# EAGLE board CT_schematic (EAGLE 7.6.0)

Size 100 x 80 mm. Coordinates in mm from the lower left corner, seen from the top.
Outline: 0,0 100,0 100,80 0,80 0,0
Copper layers (1*16): Top 0.035mm / dielectric 1.5mm / Bottom 0.035mm
Design rules "default": minimum track width 10mil, minimum drill 24mil, track to track 8mil, track to pad 8mil, pad to pad 8mil, via to via 8mil, smd to smd 8mil, copper to edge 40mil, drill to drill 8mil, minimum pad ring 10mil, minimum via ring 8mil, stop-mask expansion 4mil, vias tented up to drill 0mil, thermal gap 10mil

## Footprints (pad centres in the part's own frame; a part is rotated, then mirrored left to right if it is on the bottom)
C0402 = smd 0.5 x 0.5: 1 -0.508,0; 2 0.508,0
C0805 = smd 1.2 x 1.3: 1 -1.016,0; 2 1.016,0
C0603 = smd 0.8 x 0.8: 1 -0.762,0; 2 0.762,0
EXV-9B = smd 2.718 x 1.778: 1 -2.108,0; 2 2.108,0
C1206 = smd 1.3 x 1.6: 1 -1.524,0; 2 1.524,0
C1210 = smd 1.2 x 2.5: 1 -1.524,0; 2 1.524,0
2220 = smd 1.85 x 5.5: 1 -2.55,0; 2 2.55,0
R0603 = smd 0.8 x 0.8: 1 -0.762,0; 2 0.762,0
EXV-9H = smd 3.505 x 1.676: 1 -2.857,0; 2 2.857,0
DR1040 = smd 1.6 x 3.2: 1 -4.458,0; 2 4.458,0
WE-HCI_7030/7040/7050 = smd 2.5 x 3: 1 -2.45,0; 2 2.45,0
PJ-037B_PACKAGE = drill 3.7 square: 1 12,0 | drill 3.2 square: 2 6,0
LFBGA324 = smd 0.508 x 0.508: A1 -6.8,6.8; A2 -6,6.8; A3 -5.2,6.8; A4 -4.4,6.8; A5 -3.6,6.8; A6 -2.8,6.8; A7 -2,6.8; A8 -1.2,6.8; A9 -0.4,6.8; A10 0.4,6.8; A11 1.2,6.8; A12 2,6.8; A13 2.8,6.8; A14 3.6,6.8; A15 4.4,6.8; A16 5.2,6.8; A17 6,6.8; A18 6.8,6.8; B1 -6.8,6; B2 -6,6; B3 -5.2,6; B4 -4.4,6; B5 -3.6,6; B6 -2.8,6; B7 -2,6; B8 -1.2,6; B9 -0.4,6; B10 0.4,6; B11 1.2,6; B12 2,6; B13 2.8,6; B14 3.6,6; B15 4.4,6; B16 5.2,6; B17 6,6; B18 6.8,6; C1 -6.8,5.2; C2 -6,5.2; C3 -5.2,5.2; C4 -4.4,5.2; C5 -3.6,5.2; C6 -2.8,5.2; C7 -2,5.2; C8 -1.2,5.2; C9 -0.4,5.2; C10 0.4,5.2; C11 1.2,5.2; C12 2,5.2; C13 2.8,5.2; C14 3.6,5.2; C15 4.4,5.2; C16 5.2,5.2; C17 6,5.2; C18 6.8,5.2; D1 -6.8,4.4; D2 -6,4.4; D3 -5.2,4.4; D4 -4.4,4.4; D5 -3.6,4.4; D6 -2.8,4.4; D7 -2,4.4; D8 -1.2,4.4; D9 -0.4,4.4; D10 0.4,4.4; D11 1.2,4.4; D12 2,4.4; D13 2.8,4.4; D14 3.6,4.4; D15 4.4,4.4; D16 5.2,4.4; D17 6,4.4; D18 6.8,4.4; E1 -6.8,3.6; E2 -6,3.6; E3 -5.2,3.6; E4 -4.4,3.6; E5 -3.6,3.6; E6 -2.8,3.6; E7 -2,3.6; E8 -1.2,3.6; E9 -0.4,3.6; E10 0.4,3.6; E11 1.2,3.6; E12 2,3.6; E13 2.8,3.6; E14 3.6,3.6; E15 4.4,3.6; E16 5.2,3.6; E17 6,3.6; E18 6.8,3.6; F1 -6.8,2.8; F2 -6,2.8; F3 -5.2,2.8; F4 -4.4,2.8; F5 -3.6,2.8; F6 -2.8,2.8; F7 -2,2.8; F8 -1.2,2.8; F9 -0.4,2.8; F10 0.4,2.8; F11 1.2,2.8; F12 2,2.8; F13 2.8,2.8; F14 3.6,2.8; F15 4.4,2.8; F16 5.2,2.8; F17 6,2.8; F18 6.8,2.8; G1 -6.8,2; G2 -6,2; G3 -5.2,2; G4 -4.4,2; G5 -3.6,2; G6 -2.8,2; G7 -2,2; G8 -1.2,2; G9 -0.4,2; G10 0.4,2; G11 1.2,2; G12 2,2; G13 2.8,2; G14 3.6,2; G15 4.4,2; G16 5.2,2; G17 6,2; G18 6.8,2; H1 -6.8,1.2; H2 -6,1.2; H3 -5.2,1.2; H4 -4.4,1.2; H5 -3.6,1.2; H6 -2.8,1.2; H7 -2,1.2; H8 -1.2,1.2; H9 -0.4,1.2; H10 0.4,1.2; H11 1.2,1.2; H12 2,1.2; H13 2.8,1.2; H14 3.6,1.2; H15 4.4,1.2; H16 5.2,1.2; H17 6,1.2; H18 6.8,1.2; J1 -6.8,0.4; J2 -6,0.4; J3 -5.2,0.4; J4 -4.4,0.4; J5 -3.6,0.4; J6 -2.8,0.4; J7 -2,0.4; J8 -1.2,0.4; J9 -0.4,0.4; J10 0.4,0.4; J11 1.2,0.4; J12 2,0.4; J13 2.8,0.4; J14 3.6,0.4; J15 4.4,0.4; J16 5.2,0.4; J17 6,0.4; J18 6.8,0.4; K1 -6.8,-0.4; K2 -6,-0.4; K3 -5.2,-0.4; K4 -4.4,-0.4; K5 -3.6,-0.4; K6 -2.8,-0.4; K7 -2,-0.4; K8 -1.2,-0.4; K9 -0.4,-0.4; K10 0.4,-0.4; K11 1.2,-0.4; K12 2,-0.4; K13 2.8,-0.4; K14 3.6,-0.4; K15 4.4,-0.4; K16 5.2,-0.4; K17 6,-0.4; K18 6.8,-0.4; L1 -6.8,-1.2; L2 -6,-1.2; L3 -5.2,-1.2; L4 -4.4,-1.2; L5 -3.6,-1.2; L6 -2.8,-1.2; L7 -2,-1.2; L8 -1.2,-1.2; L9 -0.4,-1.2; L10 0.4,-1.2; L11 1.2,-1.2; L12 2,-1.2; L13 2.8,-1.2; L14 3.6,-1.2; L15 4.4,-1.2; L16 5.2,-1.2; L17 6,-1.2; L18 6.8,-1.2; M1 -6.8,-2; M2 -6,-2; M3 -5.2,-2; M4 -4.4,-2; M5 -3.6,-2; M6 -2.8,-2; M7 -2,-2; M8 -1.2,-2; M9 -0.4,-2; M10 0.4,-2; M11 1.2,-2; M12 2,-2; M13 2.8,-2; M14 3.6,-2; M15 4.4,-2; M16 5.2,-2; M17 6,-2; M18 6.8,-2; N1 -6.8,-2.8; N2 -6,-2.8; N3 -5.2,-2.8; N4 -4.4,-2.8; N5 -3.6,-2.8; N6 -2.8,-2.8; N7 -2,-2.8; N8 -1.2,-2.8; N9 -0.4,-2.8; N10 0.4,-2.8; N11 1.2,-2.8; N12 2,-2.8; N13 2.8,-2.8; N14 3.6,-2.8; N15 4.4,-2.8; N16 5.2,-2.8; N17 6,-2.8; N18 6.8,-2.8; P1 -6.8,-3.6; P2 -6,-3.6; P3 -5.2,-3.6; P4 -4.4,-3.6; P5 -3.6,-3.6; P6 -2.8,-3.6; P7 -2,-3.6; P8 -1.2,-3.6; P9 -0.4,-3.6; P10 0.4,-3.6; P11 1.2,-3.6; P12 2,-3.6; P13 2.8,-3.6; P14 3.6,-3.6; P15 4.4,-3.6; P16 5.2,-3.6; P17 6,-3.6; P18 6.8,-3.6; R1 -6.8,-4.4; R2 -6,-4.4; R3 -5.2,-4.4; R4 -4.4,-4.4; R5 -3.6,-4.4; R6 -2.8,-4.4; R7 -2,-4.4; R8 -1.2,-4.4; R9 -0.4,-4.4; R10 0.4,-4.4; R11 1.2,-4.4; R12 2,-4.4; R13 2.8,-4.4; R14 3.6,-4.4; R15 4.4,-4.4; R16 5.2,-4.4; R17 6,-4.4; R18 6.8,-4.4; T1 -6.8,-5.2; T2 -6,-5.2; T3 -5.2,-5.2; T4 -4.4,-5.2; T5 -3.6,-5.2; T6 -2.8,-5.2; T7 -2,-5.2; T8 -1.2,-5.2; T9 -0.4,-5.2; T10 0.4,-5.2; T11 1.2,-5.2; T12 2,-5.2; T13 2.8,-5.2; T14 3.6,-5.2; T15 4.4,-5.2; T16 5.2,-5.2; T17 6,-5.2; T18 6.8,-5.2; U1 -6.8,-6; U2 -6,-6; U3 -5.2,-6; U4 -4.4,-6; U5 -3.6,-6; U6 -2.8,-6; U7 -2,-6; U8 -1.2,-6; U9 -0.4,-6; U10 0.4,-6; U11 1.2,-6; U12 2,-6; U13 2.8,-6; U14 3.6,-6; U15 4.4,-6; U16 5.2,-6; U17 6,-6; U18 6.8,-6; V1 -6.8,-6.8; V2 -6,-6.8; V3 -5.2,-6.8; V4 -4.4,-6.8; V5 -3.6,-6.8; V6 -2.8,-6.8; V7 -2,-6.8; V8 -1.2,-6.8; V9 -0.4,-6.8; V10 0.4,-6.8; V11 1.2,-6.8; V12 2,-6.8; V13 2.8,-6.8; V14 3.6,-6.8; V15 4.4,-6.8; V16 5.2,-6.8; V17 6,-6.8; V18 6.8,-6.8
10100565 = smd 0.8 x 2.35: 1 0,0; 2 1.25,0; 3 2.55,0; 4 4.25,0; 5 5.43,0; 6 6.68,0; 7 7.93,0; 8 9.18,0; 9 11.67,0; 10 14.18,0; 11 15.43,0; 12 16.68,0; 13 17.93,0; 14 19.18,0; 15 21.68,0 | smd 1.5 x 3.1: 16 23.495,-1.375; 20 25.685,-22.875 | smd 1.55 x 3.1: 17 -1.815,-1.375; 21 -1.815,-22.875 | drill 1.1 pad 1.1: 18 21.68,-2.375; 19 0.68,-2.375
SAMTEC_FTSH-105-01-L-DV-K = smd 0.762 x 2.794: 1 -2.54,-2.032; 2 -2.54,2.032; 3 -1.27,-2.032; 4 -1.27,2.032; 5 0,-2.032; 6 0,2.032; 7 1.27,-2.032; 8 1.27,2.032; 9 2.54,-2.032; 10 2.54,2.032
QFN-32 = smd 0.6 x 0.3: 1 -2.3,1.75; 2 -2.3,1.25; 3 -2.3,0.75; 4 -2.3,0.25; 5 -2.3,-0.25; 6 -2.3,-0.75; 7 -2.3,-1.25; 8 -2.3,-1.75; 17 2.3,-1.75; 18 2.3,-1.25; 19 2.3,-0.75; 20 2.3,-0.25; 21 2.3,0.25; 22 2.3,0.75; 23 2.3,1.25; 24 2.3,1.75 | smd 0.3 x 0.6: 9 -1.75,-2.3; 10 -1.25,-2.3; 11 -0.75,-2.3; 12 -0.25,-2.3; 13 0.25,-2.3; 14 0.75,-2.3; 15 1.25,-2.3; 16 1.75,-2.3; 25 1.75,2.3; 26 1.25,2.3; 27 0.75,2.3; 28 0.25,2.3; 29 -0.25,2.3; 30 -0.75,2.3; 31 -1.25,2.3; 32 -1.75,2.3 | smd 3.2 x 3.2: EXP 0,0
7498011122R = smd 0.71 x 2.29: 1 -3.545,-3.18; 2 -2.525,-3.18; 3 -1.505,-3.18; 4 -0.485,-3.18; 5 0.535,-3.18; 6 1.555,-3.18; 8 3.595,-3.18; 9 5.635,-3.18; 10 6.655,-3.18; 11 -6.605,-3.18; 12 -5.585,-3.18 | smd 1.4 x 2.54: 13 -8.51,10.2; 14 8.51,10.2 | hole 1.4: -3.5,0; 3.5,0
AT24C02D = smd 1.6 x 0.6: 1 -2.475,1.905 | smd 1.55 x 0.6: 2 -2.475,0.635; 3 -2.475,-0.635; 4 -2.475,-1.905; 5 2.475,-1.905; 6 2.475,-0.635; 7 2.475,0.635; 8 2.475,1.905
S29VS256RABBHW000 = smd 0.3 x 0.3: A1 -6,3; A14 0.5,3; C3 -5,2; C4 -4.5,2; C5 -4,2; C6 -3.5,2; C7 -3,2; C8 -2.5,2; C9 -2,2; C10 -1.5,2; C11 -1,2; C12 -0.5,2; D3 -5,1.5; D4 -4.5,1.5; D5 -4,1.5; D6 -3.5,1.5; D7 -3,1.5; D8 -2.5,1.5; D9 -2,1.5; D10 -1.5,1.5; D11 -1,1.5; D12 -0.5,1.5; E3 -5,1; E4 -4.5,1; E5 -4,1; E6 -3.5,1; E7 -3,1; E8 -2.5,1; E9 -2,1; E10 -1.5,1; E11 -1,1; E12 -0.5,1; F3 -5,0.5; F4 -4.5,0.5; F5 -4,0.5; F6 -3.5,0.5; F7 -3,0.5; F8 -2.5,0.5; F9 -2,0.5; F10 -1.5,0.5; F11 -1,0.5; F12 -0.5,0.5; H1 -6,-0.5; H14 0.5,-0.5
ABS07-32.768KHZ-7-T = smd 1.1 x 2.4: 1 -2.5,0; 2 0,0
ABLS-25.000MHZ-B2F-T = smd 5.6 x 2.8: 1 -3.81,0; 2 5.69,0
ASDMB-XX.XXXXMHZ-XX-XX-XXX = smd 0.65 x 0.85: 1 0.45,0.2; 2 2.05,0.2; 3 2.05,1.8; 4 0.45,1.8
LP2954 = smd 1.6 x 0.6: 1 -2.475,1.905 | smd 1.55 x 0.6: 2 -2.475,0.635; 3 -2.475,-0.635; 4 -2.475,-1.905; 5 2.475,-1.905; 6 2.475,-0.635; 7 2.475,0.635; 8 2.475,1.905
WSON-8 = smd 0.3 x 0.6: 1 -0.75,0; 2 0.05,0; 3 0.85,0; 4 1.65,0; 5 1.65,3.8; 6 0.85,3.8; 7 0.05,3.8; 8 -0.75,3.8 | smd 3 x 2.6: PAD 0.45,1.9
QFN-16_EP = smd 0.805 x 0.3: 1 -1.452,0.75; 2 -1.452,0.25; 3 -1.452,-0.25; 4 -1.452,-0.75; 9 1.452,-0.75; 10 1.452,-0.25; 11 1.452,0.25; 12 1.452,0.75 | smd 0.3 x 0.805: 5 -0.75,-1.452; 6 -0.25,-1.452; 7 0.25,-1.452; 8 0.75,-1.452; 13 0.75,1.452; 14 0.25,1.452; 15 -0.25,1.452; 16 -0.75,1.452 | smd 1.55 x 1.55: 17 0,0
QFN-38_UHF = smd 0.75 x 0.3: 1 -2.4,2.75; 2 -2.4,2.25; 3 -2.4,1.75; 4 -2.4,1.25; 6 -2.4,0.25; 7 -2.4,-0.25; 8 -2.4,-0.75; 9 -2.4,-1.25; 10 -2.4,-1.75; 11 -2.4,-2.25; 12 -2.4,-2.75; 20 2.4,-2.75; 21 2.4,-2.25; 22 2.4,-1.75; 23 2.4,-1.25; 24 2.4,-0.75; 25 2.4,-0.25; 26 2.4,0.25; 27 2.4,0.75; 28 2.4,1.25; 29 2.4,1.75; 30 2.4,2.25; 31 2.4,2.75 | smd 0.758 x 0.3: 5 -2.4,0.75 | smd 0.3 x 0.75: 13 -1.5,-3.4; 14 -1,-3.4; 15 -0.5,-3.4; 16 0,-3.4; 17 0.5,-3.4; 18 1,-3.4; 19 1.5,-3.4; 32 1.5,3.4; 33 1,3.4; 34 0.5,3.4; 35 0,3.4; 36 -0.5,3.4; 37 -1,3.4; 38 -1.5,3.4 | smd 3.2 x 5.2: 39 0,0
IRF8306MTRPBF = smd 0.9 x 1.85: 1 0,0; 2 0,-2.35; 6 6.4,0; 7 6.4,-2.35 | smd 0.75 x 0.75: 3 1.75,-1.175 | smd 1.45 x 0.87: 4 3.5,-0.565; 5 3.5,-1.785
SW_4-1437565-2 = smd 1.4 x 2.1: 1 -2.23,4.55; 2 -2.23,-4.55; 3 2.23,4.55; 4 2.23,-4.55
LGM67K-G1J2-24-Z = smd 0.8 x 1.4: A -2,0; C 0,0
NC7SZ125M5X = smd 1.3 x 0.7: 1 -1.3,0.95; 2 -1.3,0; 3 -1.3,-0.95; 4 1.3,-0.95; 5 1.3,0.95

## Placement (x,y rotation side)
C1  1e-07  [C0402]  -102.87,109.22 0 top  (outside the outline)
C2  1e-08  [C0402]  -106.68,109.22 0 top  (outside the outline)
C3  1e-08  [C0402]  -110.49,109.22 0 top  (outside the outline)
C4  1e-08  [C0402]  -114.3,109.22 0 top  (outside the outline)
C5  1e-08  [C0402]  -15.24,114.3 0 top  (outside the outline)
C6  1e-07  [C0402]  -19.05,114.3 0 top  (outside the outline)
C7  1e-07  [C0402]  -22.86,114.3 0 top  (outside the outline)
C8  1e-08  [C0402]  -26.67,114.3 0 top  (outside the outline)
C9  1e-08  [C0402]  -30.48,114.3 0 top  (outside the outline)
C10  1e-08  [C0402]  -34.29,114.3 0 top  (outside the outline)
C11  1e-05  [C0805]  -40.64,72.39 0 top  (outside the outline)
C12  1e-08  [C0402]  -38.1,114.3 0 top  (outside the outline)
C13  1e-05  [C0805]  -45.72,72.39 0 top  (outside the outline)
C14  1e-08  [C0402]  -41.91,114.3 0 top  (outside the outline)
C15  1e-08  [C0402]  -45.72,114.3 0 top  (outside the outline)
C16  1e-08  [C0402]  -49.53,114.3 0 top  (outside the outline)
C17  1e-05  [C0805]  -50.8,72.39 0 top  (outside the outline)
C18  1e-08  [C0402]  -53.34,114.3 0 top  (outside the outline)
C19  1e-08  [C0402]  -57.15,114.3 0 top  (outside the outline)
C20  1e-05  [C0805]  -55.88,72.39 0 top  (outside the outline)
C21  1e-08  [C0402]  -60.96,114.3 0 top  (outside the outline)
C22  1e-08  [C0402]  -64.77,114.3 0 top  (outside the outline)
C23  1e-05  [C0805]  -60.96,72.39 0 top  (outside the outline)
C24  1e-08  [C0402]  -68.58,114.3 0 top  (outside the outline)
C25  1e-08  [C0402]  -72.39,114.3 0 top  (outside the outline)
C26  1e-05  [C0805]  -66.04,72.39 0 top  (outside the outline)
C27  1e-08  [C0402]  -76.2,114.3 0 top  (outside the outline)
C28  1e-08  [C0402]  -80.01,114.3 0 top  (outside the outline)
C29  1e-05  [C0805]  -71.12,72.39 0 top  (outside the outline)
C30  1e-08  [C0402]  -83.82,114.3 0 top  (outside the outline)
C31  1e-08  [C0402]  -87.63,114.3 0 top  (outside the outline)
C32  1e-05  [C0805]  -76.2,72.39 0 top  (outside the outline)
C33  1e-08  [C0402]  -91.44,114.3 0 top  (outside the outline)
C34  1e-08  [C0402]  -95.25,114.3 0 top  (outside the outline)
C35  1e-08  [C0402]  -99.06,114.3 0 top  (outside the outline)
C36  1e-08  [C0402]  -102.87,114.3 0 top  (outside the outline)
C37  1e-08  [C0402]  -106.68,114.3 0 top  (outside the outline)
C38  1e-08  [C0402]  -110.49,114.3 0 top  (outside the outline)
C39  1e-06  [C0603]  -80.01,99.06 0 top  (outside the outline)
C40  1e-06  [C0603]  -83.82,99.06 0 top  (outside the outline)
C41  1e-06  [C0603]  -87.63,99.06 0 top  (outside the outline)
C42  1e-06  [C0603]  -91.44,99.06 0 top  (outside the outline)
C43  1.2e-11  [C0402]  -34.29,109.22 0 top  (outside the outline)
C44  1.2e-11  [C0402]  -38.1,109.22 0 top  (outside the outline)
C45  1e-05  [C0805]  -81.28,72.39 0 top  (outside the outline)
C46  1e-08  [C0402]  -114.3,114.3 0 top  (outside the outline)
C47  1e-08  [C0402]  -15.24,119.38 0 top  (outside the outline)
C48  1e-08  [C0402]  -19.05,119.38 0 top  (outside the outline)
C49  1e-08  [C0402]  -22.86,119.38 0 top  (outside the outline)
C50  1e-08  [C0402]  -26.67,119.38 0 top  (outside the outline)
C51  1e-08  [C0402]  -30.48,119.38 0 top  (outside the outline)
C52  1e-08  [C0402]  -34.29,119.38 0 top  (outside the outline)
C53  1e-08  [C0402]  -38.1,119.38 0 top  (outside the outline)
C54  1e-05  [C0805]  -86.36,72.39 0 top  (outside the outline)
C55  1e-08  [C0402]  -41.91,119.38 0 top  (outside the outline)
C56  1e-08  [C0402]  -45.72,119.38 0 top  (outside the outline)
C57  1e-08  [C0402]  -49.53,119.38 0 top  (outside the outline)
C58  1e-08  [C0402]  -53.34,119.38 0 top  (outside the outline)
C59  1e-08  [C0402]  -57.15,119.38 0 top  (outside the outline)
C60  1e-05  [C0805]  -91.44,72.39 0 top  (outside the outline)
C61  1e-08  [C0402]  -60.96,119.38 0 top  (outside the outline)
C62  1e-08  [C0402]  -64.77,119.38 0 top  (outside the outline)
C63  1e-08  [C0402]  -68.58,119.38 0 top  (outside the outline)
C64  1e-08  [C0402]  -72.39,119.38 0 top  (outside the outline)
C65  1e-07  [C0402]  -76.2,119.38 0 top  (outside the outline)
C66  1e-05  [C0805]  -96.52,72.39 0 top  (outside the outline)
C67  1e-05  [C0805]  -101.6,72.39 0 top  (outside the outline)
C68  1e-05  [C0805]  -106.68,72.39 0 top  (outside the outline)
C69  1e-05  [C0805]  -111.76,72.39 0 top  (outside the outline)
C70  1e-07  [C0402]  -80.01,119.38 0 top  (outside the outline)
C71  1e-07  [C0402]  -83.82,119.38 0 top  (outside the outline)
C72  1e-07  [C0402]  -87.63,119.38 0 top  (outside the outline)
C73  1e-07  [C0402]  -91.44,119.38 0 top  (outside the outline)
C74  1e-07  [C0402]  -95.25,119.38 0 top  (outside the outline)
C75  1e-07  [C0402]  -99.06,119.38 0 top  (outside the outline)
C76  1e-07  [C0402]  -102.87,119.38 0 top  (outside the outline)
C77  1e-07  [C0402]  -106.68,119.38 0 top  (outside the outline)
C78  1e-07  [C0402]  -110.49,119.38 0 top  (outside the outline)
C79  1e-07  [C0402]  -114.3,119.38 0 top  (outside the outline)
C80  1e-07  [C0402]  -15.24,124.46 0 top  (outside the outline)
C81  1e-07  [C0402]  -19.05,124.46 0 top  (outside the outline)
C82  1e-07  [C0402]  -22.86,124.46 0 top  (outside the outline)
C83  1e-07  [C0402]  -26.67,124.46 0 top  (outside the outline)
C84  1e-07  [C0402]  -30.48,124.46 0 top  (outside the outline)
C85  1e-07  [C0402]  -34.29,124.46 0 top  (outside the outline)
C86  1e-07  [C0402]  -38.1,124.46 0 top  (outside the outline)
C87  1e-07  [C0402]  -41.91,124.46 0 top  (outside the outline)
C88  1e-07  [C0402]  -45.72,124.46 0 top  (outside the outline)
C89  1e-07  [C0402]  -49.53,124.46 0 top  (outside the outline)
C90  1e-07  [C0402]  -53.34,124.46 0 top  (outside the outline)
C91  1e-07  [C0402]  -57.15,124.46 0 top  (outside the outline)
C92  1e-05  [C0805]  -15.24,78.74 0 top  (outside the outline)
C93  1e-07  [C0402]  -60.96,124.46 0 top  (outside the outline)
C94  2.2e-08  [C0402]  -41.91,109.22 0 top  (outside the outline)
C95  1e-06  [C0603]  -95.25,99.06 0 top  (outside the outline)
C96  1e-06  [C0603]  -99.06,99.06 0 top  (outside the outline)
C97  4.7e-10  [C0603]  -64.77,99.06 0 top  (outside the outline)
C98  1e-06  [C0603]  -102.87,99.06 0 top  (outside the outline)
C99  1e-11  [C0402]  -64.77,124.46 0 top  (outside the outline)
C100  1e-11  [C0402]  -45.72,109.22 0 top  (outside the outline)
C101  1e-08  [C0402]  -49.53,109.22 0 top  (outside the outline)
C102  1e-07  [C0402]  -53.34,109.22 0 top  (outside the outline)
C103  2.2e-06  [C0603]  -68.58,99.06 0 top  (outside the outline)
C104  1e-07  [C0402]  -57.15,109.22 0 top  (outside the outline)
C105  2.2e-06  [C0603]  -72.39,99.06 0 top  (outside the outline)
C106  1e-08  [C0402]  -60.96,109.22 0 top  (outside the outline)
C107  1e-06  [EXV-9B]  -100.33,64.77 0 top  (outside the outline)
C108  2.2e-06  [EXV-9B]  -109.22,64.77 0 top  (outside the outline)
C109  1e-08  [C0402]  -64.77,109.22 0 top  (outside the outline)
C110  1e-05  [C1206]  -86.36,64.77 0 top  (outside the outline)
C111  1e-05  [C0805]  -20.32,78.74 0 top  (outside the outline)
C112  1e-06  [C0603]  -106.68,99.06 0 top  (outside the outline)
C113  1e-05  [C1210]  -80.01,66.04 0 top  (outside the outline)
C114  1e-08  [C0402]  -68.58,109.22 0 top  (outside the outline)
C115  1e-05  [C1206]  -92.71,64.77 0 top  (outside the outline)
C116  1e-05  [C0805]  -25.4,78.74 0 top  (outside the outline)
C117  1e-05  [C0805]  -30.48,78.74 0 top  (outside the outline)
C118  1e-06  [C0603]  -110.49,99.06 0 top  (outside the outline)
C119  1e-07  [C0402]  -72.39,109.22 0 top  (outside the outline)
C120  6.8e-05  [2220]  -93.98,48.26 0 top  (outside the outline)
C121  1e-05  [C0805]  -35.56,78.74 0 top  (outside the outline)
C122  1e-06  [C0603]  -114.3,99.06 0 top  (outside the outline)
C123  1e-07  [C0402]  -76.2,109.22 0 top  (outside the outline)
C124  6.8e-05  [2220]  -101.6,48.26 0 top  (outside the outline)
C125  1e-05  [C0805]  -40.64,78.74 0 top  (outside the outline)
C126  1e-06  [C0603]  -15.24,104.14 0 top  (outside the outline)
C127  1e-07  [C0402]  -80.01,109.22 0 top  (outside the outline)
C128  6.8e-05  [2220]  -109.22,48.26 0 top  (outside the outline)
C129  1e-07  [C0402]  -83.82,109.22 0 top  (outside the outline)
C130  2.2e-06  [C0603]  -76.2,99.06 0 top  (outside the outline)
C131  2.45e-08  [R0603]  -50.8,88.9 0 top  (outside the outline)
C132  2.8258362168397e-09  [R0603]  -50.8,78.74 0 top  (outside the outline)
C133  7.105e-09  [R0603]  -60.96,78.74 0 top  (outside the outline)
C134  0.0001  [EXV-9H]  -105.41,57.15 0 top  (outside the outline)
C135  0.0001  [EXV-9H]  -17.78,66.04 0 top  (outside the outline)
C136  1e-08  [C0402]  -87.63,109.22 0 top  (outside the outline)
C137  1e-08  [C0402]  -91.44,109.22 0 top  (outside the outline)
C138  1e-08  [C0402]  -95.25,109.22 0 top  (outside the outline)
C139  1e-08  [C0402]  -99.06,109.22 0 top  (outside the outline)
I1  97.0  [R0603]  -19.05,104.14 0 top  (outside the outline)
I5  2.5e-06  [DR1040]  -62.23,35.56 0 top  (outside the outline)
I6  3.3e-06  [WE-HCI_7030/7040/7050]  -33.02,35.56 0 top  (outside the outline)
I7  3.8e-06  [DR1040]  -73.66,35.56 0 top  (outside the outline)
J1  PJ-037B  [PJ-037B_PACKAGE]  -27.94,36.83 0 top  (outside the outline)
R2  1000.0  [R0603]  -22.86,104.14 0 top  (outside the outline)
R4  4700.0  [R0603]  -26.67,104.14 0 top  (outside the outline)
R5  4700.0  [R0603]  -30.48,104.14 0 top  (outside the outline)
R6  4700.0  [R0603]  -34.29,104.14 0 top  (outside the outline)
R7  4700.0  [R0603]  -38.1,104.14 0 top  (outside the outline)
R8  2200.0  [R0603]  -41.91,104.14 0 top  (outside the outline)
R9  2200.0  [R0603]  -45.72,104.14 0 top  (outside the outline)
R10  2200.0  [R0603]  -49.53,104.14 0 top  (outside the outline)
R11  2200.0  [R0603]  -53.34,104.14 0 top  (outside the outline)
R12  22.0  [R0603]  -57.15,104.14 0 top  (outside the outline)
R13  10000.0  [R0603]  -55.88,88.9 0 top  (outside the outline)
R14  49.9  [R0603]  -60.96,104.14 0 top  (outside the outline)
R15  100000.0  [R0603]  -66.04,78.74 0 top  (outside the outline)
R16  100000.0  [R0603]  -71.12,78.74 0 top  (outside the outline)
R17  100000.0  [R0603]  -76.2,78.74 0 top  (outside the outline)
R18  100000.0  [R0603]  -81.28,78.74 0 top  (outside the outline)
R19  100000.0  [R0603]  -86.36,78.74 0 top  (outside the outline)
R20  100000.0  [R0603]  -91.44,78.74 0 top  (outside the outline)
R21  100000.0  [R0603]  -96.52,78.74 0 top  (outside the outline)
R22  100000.0  [R0603]  -101.6,78.74 0 top  (outside the outline)
R23  100000.0  [R0603]  -106.68,78.74 0 top  (outside the outline)
R24  100000.0  [R0603]  -111.76,78.74 0 top  (outside the outline)
R25  100000.0  [R0603]  -15.24,83.82 0 top  (outside the outline)
R26  100000.0  [R0603]  -20.32,83.82 0 top  (outside the outline)
R27  100000.0  [R0603]  -25.4,83.82 0 top  (outside the outline)
R28  100000.0  [R0603]  -30.48,83.82 0 top  (outside the outline)
R29  100000.0  [R0603]  -35.56,83.82 0 top  (outside the outline)
R30  100000.0  [R0603]  -40.64,83.82 0 top  (outside the outline)
R31  100000.0  [R0603]  -45.72,83.82 0 top  (outside the outline)
R32  100000.0  [R0603]  -50.8,83.82 0 top  (outside the outline)
R33  100000.0  [R0603]  -55.88,83.82 0 top  (outside the outline)
R34  100000.0  [R0603]  -60.96,83.82 0 top  (outside the outline)
R35  100000.0  [R0603]  -66.04,83.82 0 top  (outside the outline)
R36  100000.0  [R0603]  -71.12,83.82 0 top  (outside the outline)
R37  100000.0  [R0603]  -76.2,83.82 0 top  (outside the outline)
R38  100000.0  [R0603]  -81.28,83.82 0 top  (outside the outline)
R39  100000.0  [R0603]  -86.36,83.82 0 top  (outside the outline)
R40  100000.0  [R0603]  -91.44,83.82 0 top  (outside the outline)
R41  100000.0  [R0603]  -96.52,83.82 0 top  (outside the outline)
R42  10000.0  [R0603]  -60.96,88.9 0 top  (outside the outline)
R43  10000.0  [R0603]  -66.04,88.9 0 top  (outside the outline)
R44  10000.0  [R0603]  -71.12,88.9 0 top  (outside the outline)
R45  10000.0  [R0603]  -76.2,88.9 0 top  (outside the outline)
R46  5.0  [R0603]  -64.77,104.14 0 top  (outside the outline)
R47  0.1  [R0603]  -68.58,104.14 0 top  (outside the outline)
R48  0.1  [R0603]  -72.39,104.14 0 top  (outside the outline)
R49  200.0  [R0603]  -76.2,104.14 0 top  (outside the outline)
R50  200.0  [R0603]  -80.01,104.14 0 top  (outside the outline)
R51  12100.0  [R0603]  -81.28,88.9 0 top  (outside the outline)
R52  49.9  [R0603]  -83.82,104.14 0 top  (outside the outline)
R53  49.9  [R0603]  -87.63,104.14 0 top  (outside the outline)
R54  49.9  [R0603]  -91.44,104.14 0 top  (outside the outline)
R55  10000.0  [R0603]  -86.36,88.9 0 top  (outside the outline)
R56  49.9  [R0603]  -95.25,104.14 0 top  (outside the outline)
R57  10000.0  [R0603]  -91.44,88.9 0 top  (outside the outline)
R58  10000.0  [R0603]  -96.52,88.9 0 top  (outside the outline)
R59  10000.0  [R0603]  -101.6,88.9 0 top  (outside the outline)
R60  10000.0  [R0603]  -106.68,88.9 0 top  (outside the outline)
R61  10000.0  [R0603]  -111.76,88.9 0 top  (outside the outline)
R62  10000.0  [R0603]  -15.24,93.98 0 top  (outside the outline)
R63  10000.0  [R0603]  -20.32,93.98 0 top  (outside the outline)
R64  10000.0  [R0603]  -25.4,93.98 0 top  (outside the outline)
R65  10000.0  [R0603]  -30.48,93.98 0 top  (outside the outline)
R66  10000.0  [R0603]  -35.56,93.98 0 top  (outside the outline)
R67  10000.0  [R0603]  -40.64,93.98 0 top  (outside the outline)
R68  10000.0  [R0603]  -45.72,93.98 0 top  (outside the outline)
R69  10000.0  [R0603]  -50.8,93.98 0 top  (outside the outline)
R70  10000.0  [R0603]  -55.88,93.98 0 top  (outside the outline)
R71  100000.0  [R0603]  -101.6,83.82 0 top  (outside the outline)
R72  100000.0  [R0603]  -106.68,83.82 0 top  (outside the outline)
R73  47000.0  [R0603]  -60.96,93.98 0 top  (outside the outline)
R74  100000.0  [R0603]  -111.76,83.82 0 top  (outside the outline)
R75  100000.0  [R0603]  -15.24,88.9 0 top  (outside the outline)
R76  360.0  [R0603]  -99.06,104.14 0 top  (outside the outline)
R77  1000.0  [R0603]  -102.87,104.14 0 top  (outside the outline)
R78  100000.0  [R0603]  -20.32,88.9 0 top  (outside the outline)
R79  153694.38  [R0603]  -55.88,78.74 0 top  (outside the outline)
R80  100000.0  [R0603]  -25.4,88.9 0 top  (outside the outline)
R81  100000.0  [R0603]  -30.48,88.9 0 top  (outside the outline)
R82  100.0  [R0603]  -106.68,104.14 0 top  (outside the outline)
R83  1000.0  [R0603]  -110.49,104.14 0 top  (outside the outline)
R84  20000.0  [R0603]  -66.04,93.98 0 top  (outside the outline)
R85  22600.0  [R0603]  -71.12,93.98 0 top  (outside the outline)
R86  300000.0  [R0603]  -35.56,88.9 0 top  (outside the outline)
R87  20000.0  [R0603]  -76.2,93.98 0 top  (outside the outline)
R88  39000.0  [R0603]  -81.28,93.98 0 top  (outside the outline)
R89  300000.0  [R0603]  -40.64,88.9 0 top  (outside the outline)
R90  20000.0  [R0603]  -86.36,93.98 0 top  (outside the outline)
R91  91000.0  [R0603]  -91.44,93.98 0 top  (outside the outline)
R92  300000.0  [R0603]  -45.72,88.9 0 top  (outside the outline)
R93  10000.0  [R0603]  -96.52,93.98 0 top  (outside the outline)
R94  75000.0  [R0603]  -101.6,93.98 0 top  (outside the outline)
R95  10000.0  [R0603]  -106.68,93.98 0 top  (outside the outline)
R96  10000.0  [R0603]  -111.76,93.98 0 top  (outside the outline)
R97  95300.0  [R0603]  -15.24,99.06 0 top  (outside the outline)
R98  95300.0  [R0603]  -20.32,99.06 0 top  (outside the outline)
R99  95300.0  [R0603]  -25.4,99.06 0 top  (outside the outline)
R100  95300.0  [R0603]  -30.48,99.06 0 top  (outside the outline)
R101  10000.0  [R0603]  -35.56,99.06 0 top  (outside the outline)
R102  10000.0  [R0603]  -40.64,99.06 0 top  (outside the outline)
R103  10000.0  [R0603]  -45.72,99.06 0 top  (outside the outline)
R104  10000.0  [R0603]  -50.8,99.06 0 top  (outside the outline)
R105  10000.0  [R0603]  -55.88,99.06 0 top  (outside the outline)
R106  75000.0  [R0603]  -60.96,99.06 0 top  (outside the outline)
U1  AM3356BZCZA80  [LFBGA324]  -77.47,8.89 0 top  (outside the outline)
U2  10100565  [10100565]  -40.64,25.4 0 top  (outside the outline)
U3  FTSH-105-01-L-DV-K  [SAMTEC_FTSH-105-01-L-DV-K]  -110.49,7.62 0 top  (outside the outline)
U4  LAN8710AI-EZK  [QFN-32]  -88.9,35.56 0 top  (outside the outline)
U5  7498011122R  [7498011122R]  -53.34,7.62 0 top  (outside the outline)
U6  AT24C02D-SSHM-T  [AT24C02D]  -106.68,34.29 0 top  (outside the outline)
U7  S29VS256RABBHW000  [S29VS256RABBHW000]  -83.82,55.88 0 top  (outside the outline)
U8  ABS07-32.768KHZ-7-T  [ABS07-32.768KHZ-7-T]  -59.69,66.04 0 top  (outside the outline)
U9  ABLS-25.000MHZ-B2F-T  [ABLS-25.000MHZ-B2F-T]  -36.83,66.04 0 top  (outside the outline)
U10  ASDMB-24.000MHZ-EC-T  [ASDMB-XX.XXXXMHZ-XX-XX-XXX]  -66.04,1.27 0 top  (outside the outline)
U11  LP2954AIMX/NOPB  [LP2954]  -25.4,48.26 0 top  (outside the outline)
U12  LP3878SDX-ADJ/NOPB  [WSON-8]  -30.48,55.88 0 top  (outside the outline)
U13  LP2951ACSDX/NOPB  [WSON-8]  -68.58,55.88 0 top  (outside the outline)
U14  LP3878SDX-ADJ/NOPB  [WSON-8]  -50.8,55.88 0 top  (outside the outline)
U15  LTC3601EUD#PBF  [QFN-16_EP]  -15.24,109.22 0 top  (outside the outline)
U16  LTC3601EUD#PBF  [QFN-16_EP]  -21.59,109.22 0 top  (outside the outline)
U17  LTC3601EUD#PBF  [QFN-16_EP]  -27.94,109.22 0 top  (outside the outline)
U18  LTC2928CUHF#PBF  [QFN-38_UHF]  -95.25,57.15 0 top  (outside the outline)
U19  IRF8306MTRPbF  [IRF8306MTRPBF]  -43.18,49.53 0 top  (outside the outline)
U20  IRF8306MTRPbF  [IRF8306MTRPBF]  -58.42,49.53 0 top  (outside the outline)
U21  IRF8306MTRPbF  [IRF8306MTRPBF]  -73.66,49.53 0 top  (outside the outline)
U22  IRF8306MTRPbF  [IRF8306MTRPBF]  -88.9,49.53 0 top  (outside the outline)
U23  4-1437565-2  [SW_4-1437565-2]  -52.07,35.56 0 top  (outside the outline)
U24  Q65110A2395  [LGM67K-G1J2-24-Z]  -68.58,66.04 0 top  (outside the outline)
U25  nc7sz125m5x  [NC7SZ125M5X]  -15.24,72.39 0 top  (outside the outline)
U26  nc7sz125m5x  [NC7SZ125M5X]  -21.59,72.39 0 top  (outside the outline)
U27  nc7sz125m5x  [NC7SZ125M5X]  -27.94,72.39 0 top  (outside the outline)
U28  nc7sz125m5x  [NC7SZ125M5X]  -34.29,72.39 0 top  (outside the outline)

## Library data of the parts
C1-C139 I1 I5-I7 J1 R2 R4-R106 U1-U28 = circuit_tree

## Nets
CLK_CRYSTAL_U1_A4: C44.1 U1.A4 U8.2
CLK_CRYSTAL_U1_A6: C43.1 U1.A6 U8.1
CLK_CRYSTAL_U4_4: C100.1 U4.4 U9.2
CLK_CRYSTAL_U4_5: C99.1 U4.5 U9.1
CLK_U1_V10: U1.V10 U10.3
GND: C1.2 C2.2 C3.2 C4.2 C5.2 C6.2 C7.2 C8.2 C9.2 C10.2 C11.2 C12.2 C13.2 C14.2 C15.2 C16.2 C17.2 C18.2 C19.2 C20.2 C21.2 C22.2 C23.2 C24.2 C25.2 C26.2 C27.2 C28.2 C29.2 C30.2 C31.2 C32.2 C33.2 C34.2 C35.2 C36.2 C37.2 C38.2 C39.2 C40.2 C41.2 C42.2 C43.2 C44.2 C45.2 C46.2 C47.2 C48.2 C49.2 C50.2 C51.2 C52.2 C53.2 C54.2 C55.2 C56.2 C57.2 C58.2 C59.2 C60.2 C61.2 C62.2 C63.2 C64.2 C65.2 C66.2 C67.2 C68.2 C69.2 C70.2 C71.2 C72.2 C73.2 C74.2 C75.2 C76.2 C77.2 C78.2 C79.2 C80.2 C81.2 C82.2 C83.2 C84.2 C85.2 C86.2 C87.2 C88.2 C89.2 C90.2 C91.2 C92.2 C93.2 C94.2 C95.2 C96.2 C97.2 C98.2 C99.2 C100.2 C101.2 C102.2 C103.2 C104.2 C105.2 C106.2 C107.2 C108.2 C109.2 C110.2 C111.2 C112.2 C113.2 C114.2 C115.2 C116.2 C117.2 C118.2 C120.1 C120.2 C121.2 C122.2 C124.1 C124.2 C125.2 C126.2 C128.1 C128.2 C129.2 C130.2 C131.2 C132.2 C133.2 C134.2 C135.2 C136.2 C137.2 C138.2 C139.2 J1.2 R2.2 R13.2 R14.2 R21.2 R22.2 R24.2 R25.2 R26.2 R27.2 R28.2 R29.2 R30.2 R45.2 R46.2 R47.2 R48.2 R49.2 R51.2 R62.2 R63.2 R65.2 R66.2 R74.2 R77.2 R80.2 R83.2 R84.2 R86.2 R87.2 R89.2 R90.2 R92.2 R94.2 R97.2 R98.2 R99.2 R100.2 R101.2 R102.2 R103.2 R104.2 R105.2 U1.A1 U1.A7 U1.A8 U1.A9 U1.A18 U1.B6 U1.B7 U1.B8 U1.B9 U1.C7 U1.C8 U1.C9 U1.D8 U1.E5 U1.E8 U1.E14 U1.F8 U1.F10 U1.G8 U1.G9 U1.G11 U1.G12 U1.H6 U1.H7 U1.H8 U1.H9 U1.H10 U1.H12 U1.J6 U1.J7 U1.J8 U1.J9 U1.J10 U1.J11 U1.K7 U1.K9 U1.K10 U1.K11 U1.L10 U1.L11 U1.L12 U1.L13 U1.M6 U1.M7 U1.M8 U1.M9 U1.M10 U1.M12 U1.M14 U1.N7 U1.N10 U1.N11 U1.N14 U1.R14 U1.V1 U1.V18 U2.6 U2.10 U2.12 U2.16 U2.17 U2.20 U2.21 U3.3 U3.5 U4.EXP U5.10 U6.4 U7.C5 U7.D12 U7.E3 U7.F5 U10.2 U11.4 U12.3 U12.PAD U13.3 U13.4 U13.PAD U14.3 U14.PAD U15.1 U15.9 U15.17 U16.1 U16.9 U16.17 U17.1 U17.9 U17.17 U18.10 U18.12 U18.13 U18.24 U18.25 U18.39 U24.C U25.2 U25.3 U26.1 U26.3 U27.1 U27.3 U28.1 U28.3
NET_U1_A10: R6.1 U1.A10 U28.4
NET_U1_B4: R13.1 U1.B4
NET_U1_B10: R7.1
NET_U1_C10: C42.1 U1.C10
NET_U1_C16: R8.1 U1.C16 U6.6
NET_U1_C17: R9.1 U1.C17 U6.5
NET_U1_D6: C40.1 U1.D6
NET_U1_D9: C39.1 U1.D9
NET_U1_D11: C41.1 U1.D11
NET_U1_F15: U23.3 U23.4
NET_U1_F16: U24.A
NET_U1_J3: R14.1 U1.J3
NET_U1_J4: C1.1 C6.1 C7.1 U1.J4
NET_U1_M17: R11.1 U1.M17 U4.16
NET_U1_M18: R10.1 U1.M18 U4.17
NET_U1_R1: R15.1 U1.R1
NET_U1_R2: R16.1 U1.R2
NET_U1_R3: R17.1 U1.R3
NET_U1_R4: R18.1 U1.R4
NET_U1_R15: C5.1 U1.R15
NET_U1_R16: C4.1 U1.R16
NET_U1_T1: R19.1 U1.T1
NET_U1_T2: R20.1 U1.T2
NET_U1_T3: R21.1 U1.T3
NET_U1_T4: R22.1 U1.T4
NET_U1_U1: R23.1 U1.U1
NET_U1_U2: R24.1 U1.U2
NET_U1_U3: R25.1 U1.U3
NET_U1_U4: R26.1 U1.U4
NET_U1_V2: R27.1 U1.V2
NET_U2_18: U2.18 U2.19
NET_U3_9: R46.1 U3.9
NET_U4_1: C95.1 I1.1 R52.2 R53.2 R54.2 R56.2 U4.1 U4.27
NET_U4_6: C96.1 C97.1 U4.6
NET_U4_18: R55.1 U4.18
NET_U4_19: R4.1 U4.19 U26.4
NET_U4_32: R51.1 U4.32
NET_U5_1: R52.1 U4.29 U5.1
NET_U5_3: R50.2 R53.1 U4.28 U5.3
NET_U5_4: R54.1 U4.31 U5.4
NET_U5_5: C94.1 U5.2 U5.5
NET_U5_6: R56.1 U4.30 U5.6
NET_U5_8: R48.1 U5.8
NET_U5_9: R50.1 U5.9
NET_U5_11: U4.2 U5.11
NET_U5_12: R49.1 U5.12
NET_U5_13: R47.1 U5.13 U5.14
NET_U6_1: R64.1 U6.1
NET_U6_2: R65.1 U6.2
NET_U6_3: R66.1 U6.3
NET_U6_7: R63.1 U6.7
NET_U7_C9: U7.C9
NET_U7_D8: R5.1 U7.D8 U27.4
NET_U11_3: R72.1 U11.3
NET_U11_5: R71.1 U11.5
NET_U11_7: R73.2 R74.1 U11.7
NET_U12_1: C109.1 U12.1
NET_U12_6: R76.2 R77.1 U12.6
NET_U12_8: R75.1 U12.8
NET_U13_5: R78.1 U13.5
NET_U13_7: R79.2 R80.1 U13.7
NET_U14_1: C114.1 U14.1
NET_U14_6: R82.2 R83.1 U14.6
NET_U14_8: R81.1 U14.8
NET_U15_3: C119.2 I5.1 U15.3 U15.4
NET_U15_6: C119.1 U15.6
NET_U15_7: C118.1 U15.7 U15.12
NET_U15_10: R86.1 U15.10
NET_U15_11: R84.1 R85.1 U15.11
NET_U15_14: U15.14
NET_U15_ATNET_3: I5.2 R85.2
NET_U16_3: C123.2 I6.1 U16.3 U16.4
NET_U16_6: C123.1 U16.6
NET_U16_7: C122.1 U16.7 U16.12
NET_U16_10: R89.1 U16.10
NET_U16_11: R87.1 R88.1 U16.11
NET_U16_14: U16.14
NET_U16_ATNET_3: I6.2 R88.2
NET_U17_3: C127.2 I7.1 U17.3 U17.4
NET_U17_6: C127.1 U17.6
NET_U17_7: C126.1 U17.7 U17.12
NET_U17_10: R92.1 U17.10
NET_U17_11: R90.1 R91.1 U17.11
NET_U17_14: U17.14
NET_U17_ATNET_3: I7.2 R91.2
NET_U18_3: R102.1 U18.3
NET_U18_6: R97.1 U18.6
NET_U18_7: R98.1 U18.7
NET_U18_8: R99.1 U18.8
NET_U18_9: R100.1 U18.9
NET_U18_16: R101.1 R106.1 U18.16
NET_U18_18: R96.1 U18.18
NET_U18_19: R95.1 U18.19 U18.20
NET_U18_21: R93.1 R94.1 U18.21 U25.4 U26.2 U27.2 U28.2
NET_U18_22: C129.1 R93.2 R95.2 R96.2 U18.11 U18.22
NET_U18_26: C132.1 U18.26
NET_U18_27: C131.1 U18.27
NET_U18_28: C133.1 U18.28
NET_U18_30: R105.1 U18.30
NET_U18_32: R104.1 U18.32
NET_U18_38: R103.1 U18.38
NET_U19_3: U18.2 U19.3
NET_U20_3: U18.37 U20.3
NET_U21_3: U18.31 U21.3
NET_U22_3: U18.29 U22.3
NET_U23_1: R2.1 U23.1 U23.2
PROC_GPMC_A17: R28.1 U1.V3 U7.D4
PROC_GPMC_A18: R29.1 U1.V4 U7.C11
PROC_GPMC_A19: R30.1 U1.T5 U7.D10
PROC_GPMC_A20: U1.R14 U7.C10
PROC_GPMC_A21: U1.V15 U7.D5
PROC_GPMC_A22: U1.G15 U7.C4
PROC_GPMC_A23: U1.G16 U7.C12
PROC_GPMC_A24: U1.G17 U7.D7
PROC_GPMC_AD0: U1.U7 U7.F3
PROC_GPMC_AD1: U1.V7 U7.F4
PROC_GPMC_AD2: U1.R8 U7.E6
PROC_GPMC_AD3: U1.T8 U7.E7
PROC_GPMC_AD4: U1.U8 U7.F8
PROC_GPMC_AD5: U1.V8 U7.F9
PROC_GPMC_AD6: U1.R9 U7.E10
PROC_GPMC_AD7: U1.T9 U7.E11
PROC_GPMC_AD8: U1.U10 U7.E4
PROC_GPMC_AD9: U1.T10 U7.E5
PROC_GPMC_AD10: U1.T11 U7.F6
PROC_GPMC_AD11: U1.U12 U7.F7
PROC_GPMC_AD12: U1.T12 U7.E8
PROC_GPMC_AD13: U1.R12 U7.E9
PROC_GPMC_AD14: U1.V13 U7.F11
PROC_GPMC_AD15: U1.U13 U7.F12
PROC_GPMC_ADVN_ALE: U1.R7 U7.D6
PROC_GPMC_CLK: U1.U9 U7.C6
PROC_GPMC_CSN0: R68.1 U1.V6 U7.D11
PROC_GPMC_OEN_REN: R70.1 U1.T7 U7.E12
PROC_GPMC_WAIT0: R67.1 U1.T17 U7.C3
PROC_GPMC_WEN: R69.1 U1.U6 U7.C8
PROC_MII1_COL: R59.1 U1.H16 U4.15
PROC_MII1_CRS: U1.H17 U4.14
PROC_MII1_RX_CLK: R61.1 U1.L18 U4.7
PROC_MII1_RX_DV: U1.J17 U4.26
PROC_MII1_RX_ER: R60.1 U1.J15 U4.13
PROC_MII1_RXD0: R57.1 U1.M16 U4.11
PROC_MII1_RXD1: R58.1 U1.L15 U4.10
PROC_MII1_RXD2: U1.L16 U4.9
PROC_MII1_RXD3: R62.1 U1.L17 U4.8
PROC_MII1_TX_CLK: U1.K18 U4.20
PROC_MII1_TX_EN: U1.J16 U4.21
PROC_MII1_TXD0: U1.K17 U4.22
PROC_MII1_TXD1: U1.K16 U4.23
PROC_MII1_TXD2: U1.K15 U4.24
PROC_MII1_TXD3: U1.J18 U4.25
PROC_MMC2_CLK: R12.2 R31.1 U1.V12 U2.8
PROC_MMC2_CLK_R: R12.1 U1.V12
PROC_MMC2_DAT0: R34.1 U1.V14 U2.4
PROC_MMC2_DAT1: R35.1 U1.U14 U2.3
PROC_MMC2_DAT2: R36.1 U1.T14 U2.15
PROC_MMC2_DAT3: R37.1 U1.U18 U2.14
PROC_MMC2_DAT4: R38.1 U1.U15 U2.13
PROC_MMC2_DAT5: R39.1 U1.T15 U2.11
PROC_MMC2_DAT6: R40.1 U1.V16 U2.7
PROC_MMC2_DAT7: R41.1 U1.U16 U2.5
PROC_MMC2_SDCD: R32.1 U1.U17 U2.2
PROC_MMC2_SDWP: R33.1 U1.A16 U2.1
PROC_TCK: R45.1 U1.A12 U3.4
PROC_TDI: R43.1 U1.B11 U3.8
PROC_TDO: U1.A11 U3.6
PROC_TMS: R44.1 U1.C11 U3.2
RST_OUT_U3_JTAG_RST_B: R42.1 U3.10 U25.1
VCC_9V3: C130.1 C134.1 C135.1 J1.1 R106.2 U18.23 U19.1 U19.2 U19.6 U19.7 U20.1 U20.2 U20.6 U20.7 U21.1 U21.2 U21.6 U21.7 U22.1 U22.2 U22.6 U22.7
VCC_S1_9V3: C107.1 R72.2 U11.8 U19.4 U19.5
VCC_S2_9V3: C110.1 R75.2 U12.4 U20.4 U20.5
VCC_S3_9V3: C112.1 U13.8 U21.4 U21.5
VCC_S4_9V3: C115.1 C117.1 C121.1 C125.1 R81.2 U14.4 U15.15 U15.16 U16.15 U16.16 U17.15 U17.16 U22.4 U22.5
VCC_TIER1_1V8: C2.1 C8.1 C9.1 C10.1 C11.1 C12.1 C13.1 C14.1 C15.1 C16.1 C60.1 C61.1 C62.1 C63.1 C64.1 C91.1 C92.1 C106.1 C108.1 C136.1 C137.1 C138.1 C139.1 R31.2 R32.2 R33.2 R34.2 R35.2 R36.2 R37.2 R38.2 R39.2 R40.2 R41.2 R71.2 R73.1 U1.D7 U1.D10 U1.E6 U1.E7 U1.E9 U1.E14 U1.F9 U1.H15 U1.K13 U1.N6 U1.N16 U1.P9 U1.P14 U1.R10 U1.R11 U2.9 U10.4 U11.1 U25.5 U26.5 U27.5 U28.5
VCC_TIER2_1V35: C65.1 C66.1 C67.1 C68.1 C69.1 C70.1 C71.1 C72.1 C73.1 C74.1 C75.1 C76.1 C77.1 C78.1 C79.1 C80.1 C81.1 C82.1 C83.1 C84.1 C85.1 C86.1 C87.1 C88.1 C89.1 C90.1 C111.1 R76.1 U1.E5 U1.F5 U1.G5 U1.H5 U1.J5 U1.K5 U1.L5 U12.5
VCC_TIER3_3V3: C3.1 C113.1 R78.2 R79.1 U1.N15 U13.1
VCC_TIER4_1V1: C45.1 C46.1 C47.1 C48.1 C49.1 C50.1 C51.1 C52.1 C53.1 C116.1 R82.1 U1.F6 U1.F7 U1.G6 U1.G7 U1.G10 U1.H11 U1.J12 U1.K6 U1.K8 U1.K12 U1.L6 U1.L7 U1.L8 U1.L9 U1.M11 U1.M13 U1.N8 U1.N9 U1.N12 U1.N13 U14.5
VCC_TIER4_1V8: C17.1 C18.1 C19.1 C20.1 C21.1 C22.1 C23.1 C24.1 C25.1 C26.1 C27.1 C28.1 C29.1 C30.1 C31.1 C32.1 C33.1 C34.1 C35.1 C36.1 C37.1 C38.1 C93.1 C98.1 C101.1 C102.1 C103.1 C104.1 C105.1 C124.2 I6.2 R4.2 R5.2 R6.2 R7.2 R8.2 R9.2 R10.2 R11.2 R15.2 R16.2 R17.2 R18.2 R19.2 R20.2 R23.2 R42.2 R43.2 R44.2 R55.2 R57.2 R58.2 R59.2 R60.2 R61.2 R64.2 R67.2 R68.2 R69.2 R70.2 R88.2 U1.E10 U1.E11 U1.E12 U1.E13 U1.F14 U1.G14 U1.H14 U1.J14 U1.K14 U1.L14 U1.N5 U1.P5 U1.P6 U1.P7 U1.P8 U1.P10 U1.P11 U1.P12 U1.P13 U3.1 U4.12 U6.8 U7.C7 U7.D3 U7.F10 U16.8
VCC_TIER4_1V26: C54.1 C55.1 C56.1 C57.1 C58.1 C59.1 C120.2 I5.2 R85.2 U1.A2 U1.F10 U1.F11 U1.F12 U1.F13 U1.G13 U1.H13 U1.J13 U15.8
VCC_TIER4_3V3: C128.2 I1.2 I7.2 R91.2 U17.8

## Tracks (layer width: path | path; a pad name or v marks a point on that pad's centre or on a via)
CLK_CRYSTAL_U1_A4  (2 unrouted)
CLK_CRYSTAL_U1_A6  (2 unrouted)
CLK_CRYSTAL_U4_4  (2 unrouted)
CLK_CRYSTAL_U4_5  (2 unrouted)
CLK_U1_V10  (1 unrouted)
GND  (286 unrouted)
NET_U1_A10  (2 unrouted)
NET_U1_B4  (1 unrouted)
NET_U1_C10  (1 unrouted)
NET_U1_C16  (2 unrouted)
NET_U1_C17  (2 unrouted)
NET_U1_D6  (1 unrouted)
NET_U1_D9  (1 unrouted)
NET_U1_D11  (1 unrouted)
NET_U1_F15  (1 unrouted)
NET_U1_J3  (1 unrouted)
NET_U1_J4  (3 unrouted)
NET_U1_M17  (2 unrouted)
NET_U1_M18  (2 unrouted)
NET_U1_R1  (1 unrouted)
NET_U1_R2  (1 unrouted)
NET_U1_R3  (1 unrouted)
NET_U1_R4  (1 unrouted)
NET_U1_R15  (1 unrouted)
NET_U1_R16  (1 unrouted)
NET_U1_T1  (1 unrouted)
NET_U1_T2  (1 unrouted)
NET_U1_T3  (1 unrouted)
NET_U1_T4  (1 unrouted)
NET_U1_U1  (1 unrouted)
NET_U1_U2  (1 unrouted)
NET_U1_U3  (1 unrouted)
NET_U1_U4  (1 unrouted)
NET_U1_V2  (1 unrouted)
NET_U2_18  (1 unrouted)
NET_U3_9  (1 unrouted)
NET_U4_1  (7 unrouted)
NET_U4_6  (2 unrouted)
NET_U4_18  (1 unrouted)
NET_U4_19  (2 unrouted)
NET_U4_32  (1 unrouted)
NET_U5_1  (2 unrouted)
NET_U5_3  (3 unrouted)
NET_U5_4  (2 unrouted)
NET_U5_5  (2 unrouted)
NET_U5_6  (2 unrouted)
NET_U5_8  (1 unrouted)
NET_U5_9  (1 unrouted)
NET_U5_11  (1 unrouted)
NET_U5_12  (1 unrouted)
NET_U5_13  (2 unrouted)
NET_U6_1  (1 unrouted)
NET_U6_2  (1 unrouted)
NET_U6_3  (1 unrouted)
NET_U6_7  (1 unrouted)
NET_U7_D8  (2 unrouted)
NET_U11_3  (1 unrouted)
NET_U11_5  (1 unrouted)
NET_U11_7  (2 unrouted)
NET_U12_1  (1 unrouted)
NET_U12_6  (2 unrouted)
NET_U12_8  (1 unrouted)
NET_U13_5  (1 unrouted)
NET_U13_7  (2 unrouted)
NET_U14_1  (1 unrouted)
NET_U14_6  (2 unrouted)
NET_U14_8  (1 unrouted)
NET_U15_3  (3 unrouted)
NET_U15_6  (1 unrouted)
NET_U15_7  (2 unrouted)
NET_U15_10  (1 unrouted)
NET_U15_11  (2 unrouted)
NET_U15_ATNET_3  (1 unrouted)
NET_U16_3  (3 unrouted)
NET_U16_6  (1 unrouted)
NET_U16_7  (2 unrouted)
NET_U16_10  (1 unrouted)
NET_U16_11  (2 unrouted)
NET_U16_ATNET_3  (1 unrouted)
NET_U17_3  (3 unrouted)
NET_U17_6  (1 unrouted)
NET_U17_7  (2 unrouted)
NET_U17_10  (1 unrouted)
NET_U17_11  (2 unrouted)
NET_U17_ATNET_3  (1 unrouted)
NET_U18_3  (1 unrouted)
NET_U18_6  (1 unrouted)
NET_U18_7  (1 unrouted)
NET_U18_8  (1 unrouted)
NET_U18_9  (1 unrouted)
NET_U18_16  (2 unrouted)
NET_U18_18  (1 unrouted)
NET_U18_19  (2 unrouted)
NET_U18_21  (6 unrouted)
NET_U18_22  (5 unrouted)
NET_U18_26  (1 unrouted)
NET_U18_27  (1 unrouted)
NET_U18_28  (1 unrouted)
NET_U18_30  (1 unrouted)
NET_U18_32  (1 unrouted)
NET_U18_38  (1 unrouted)
NET_U19_3  (1 unrouted)
NET_U20_3  (1 unrouted)
NET_U21_3  (1 unrouted)
NET_U22_3  (1 unrouted)
NET_U23_1  (2 unrouted)
PROC_GPMC_A17  (2 unrouted)
PROC_GPMC_A18  (2 unrouted)
PROC_GPMC_A19  (2 unrouted)
PROC_GPMC_A20  (1 unrouted)
PROC_GPMC_A21  (1 unrouted)
PROC_GPMC_A22  (1 unrouted)
PROC_GPMC_A23  (1 unrouted)
PROC_GPMC_A24  (1 unrouted)
PROC_GPMC_AD0  (1 unrouted)
PROC_GPMC_AD1  (1 unrouted)
PROC_GPMC_AD2  (1 unrouted)
PROC_GPMC_AD3  (1 unrouted)
PROC_GPMC_AD4  (1 unrouted)
PROC_GPMC_AD5  (1 unrouted)
PROC_GPMC_AD6  (1 unrouted)
PROC_GPMC_AD7  (1 unrouted)
PROC_GPMC_AD8  (1 unrouted)
PROC_GPMC_AD9  (1 unrouted)
PROC_GPMC_AD10  (1 unrouted)
PROC_GPMC_AD11  (1 unrouted)
PROC_GPMC_AD12  (1 unrouted)
PROC_GPMC_AD13  (1 unrouted)
PROC_GPMC_AD14  (1 unrouted)
PROC_GPMC_AD15  (1 unrouted)
PROC_GPMC_ADVN_ALE  (1 unrouted)
PROC_GPMC_CLK  (1 unrouted)
PROC_GPMC_CSN0  (2 unrouted)
PROC_GPMC_OEN_REN  (2 unrouted)
PROC_GPMC_WAIT0  (2 unrouted)
PROC_GPMC_WEN  (2 unrouted)
PROC_MII1_COL  (2 unrouted)
PROC_MII1_CRS  (1 unrouted)
PROC_MII1_RX_CLK  (2 unrouted)
PROC_MII1_RX_DV  (1 unrouted)
PROC_MII1_RX_ER  (2 unrouted)
PROC_MII1_RXD0  (2 unrouted)
PROC_MII1_RXD1  (2 unrouted)
PROC_MII1_RXD2  (1 unrouted)
PROC_MII1_RXD3  (2 unrouted)
PROC_MII1_TX_CLK  (1 unrouted)
PROC_MII1_TX_EN  (1 unrouted)
PROC_MII1_TXD0  (1 unrouted)
PROC_MII1_TXD1  (1 unrouted)
PROC_MII1_TXD2  (1 unrouted)
PROC_MII1_TXD3  (1 unrouted)
PROC_MMC2_CLK  (3 unrouted)
PROC_MMC2_CLK_R  (1 unrouted)
PROC_MMC2_DAT0  (2 unrouted)
PROC_MMC2_DAT1  (2 unrouted)
PROC_MMC2_DAT2  (2 unrouted)
PROC_MMC2_DAT3  (2 unrouted)
PROC_MMC2_DAT4  (2 unrouted)
PROC_MMC2_DAT5  (2 unrouted)
PROC_MMC2_DAT6  (2 unrouted)
PROC_MMC2_DAT7  (2 unrouted)
PROC_MMC2_SDCD  (2 unrouted)
PROC_MMC2_SDWP  (2 unrouted)
PROC_TCK  (2 unrouted)
PROC_TDI  (2 unrouted)
PROC_TDO  (1 unrouted)
PROC_TMS  (2 unrouted)
RST_OUT_U3_JTAG_RST_B  (2 unrouted)
VCC_9V3  (21 unrouted)
VCC_S1_9V3  (4 unrouted)
VCC_S2_9V3  (4 unrouted)
VCC_S3_9V3  (3 unrouted)
VCC_S4_9V3  (13 unrouted)
VCC_TIER1_1V8  (57 unrouted)
VCC_TIER2_1V35  (35 unrouted)
VCC_TIER3_3V3  (5 unrouted)
VCC_TIER4_1V1  (31 unrouted)
VCC_TIER4_1V8  (86 unrouted)
VCC_TIER4_1V26  (17 unrouted)
VCC_TIER4_3V3  (4 unrouted)